# EAGLE board Senaino (EAGLE 9.5.1)
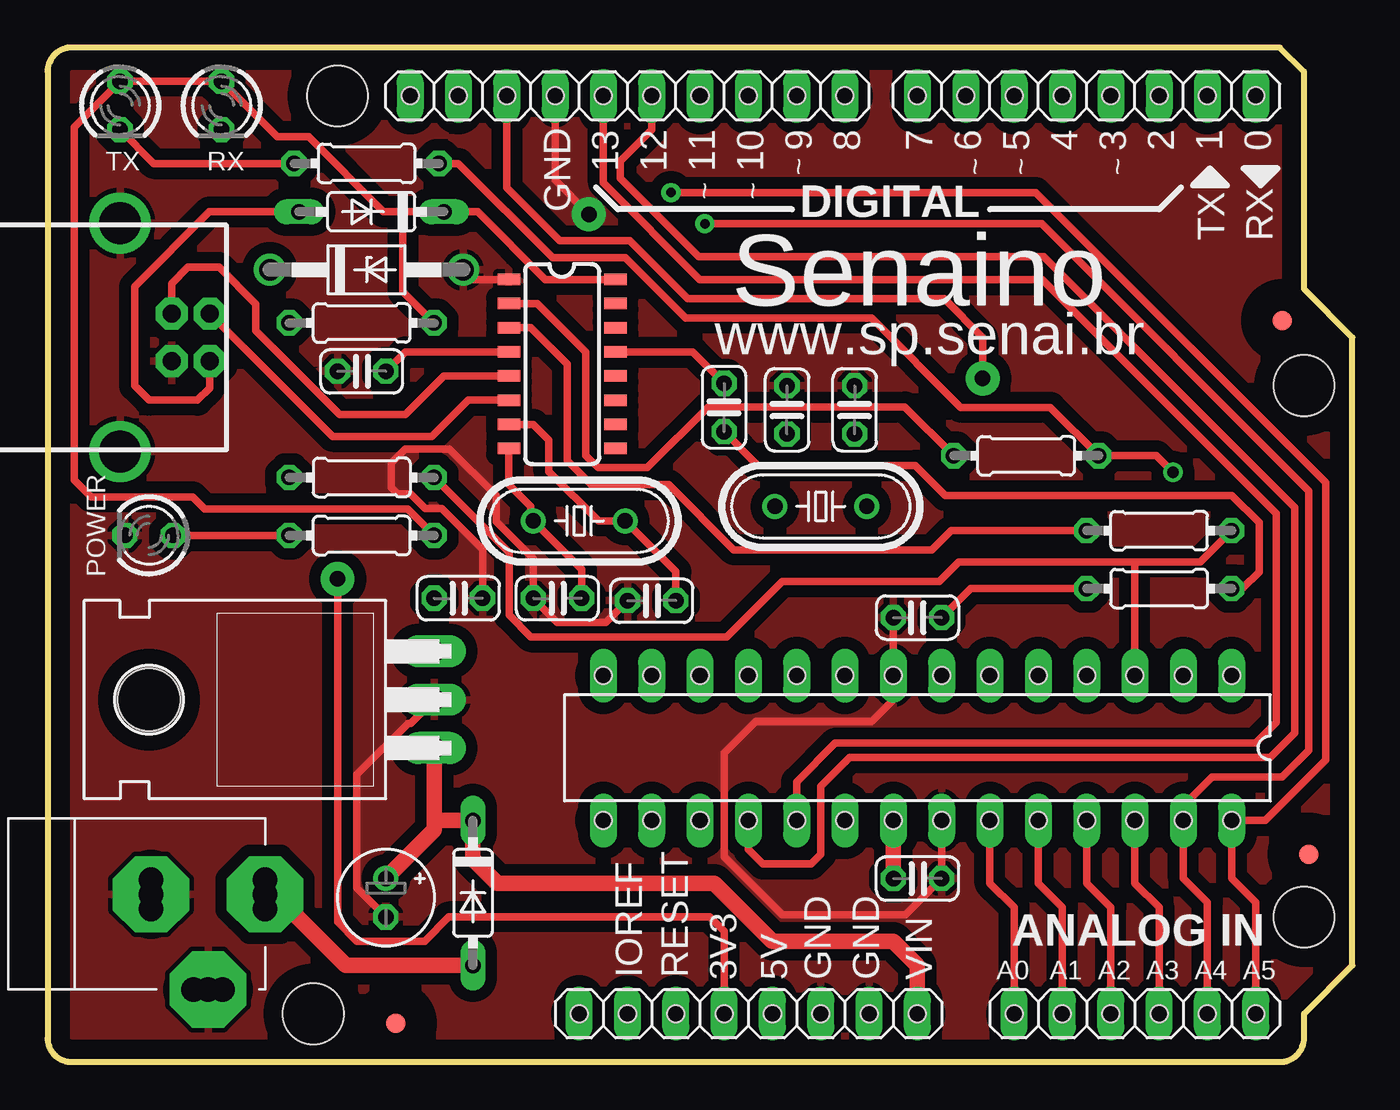
[diagram p0: board, top side]
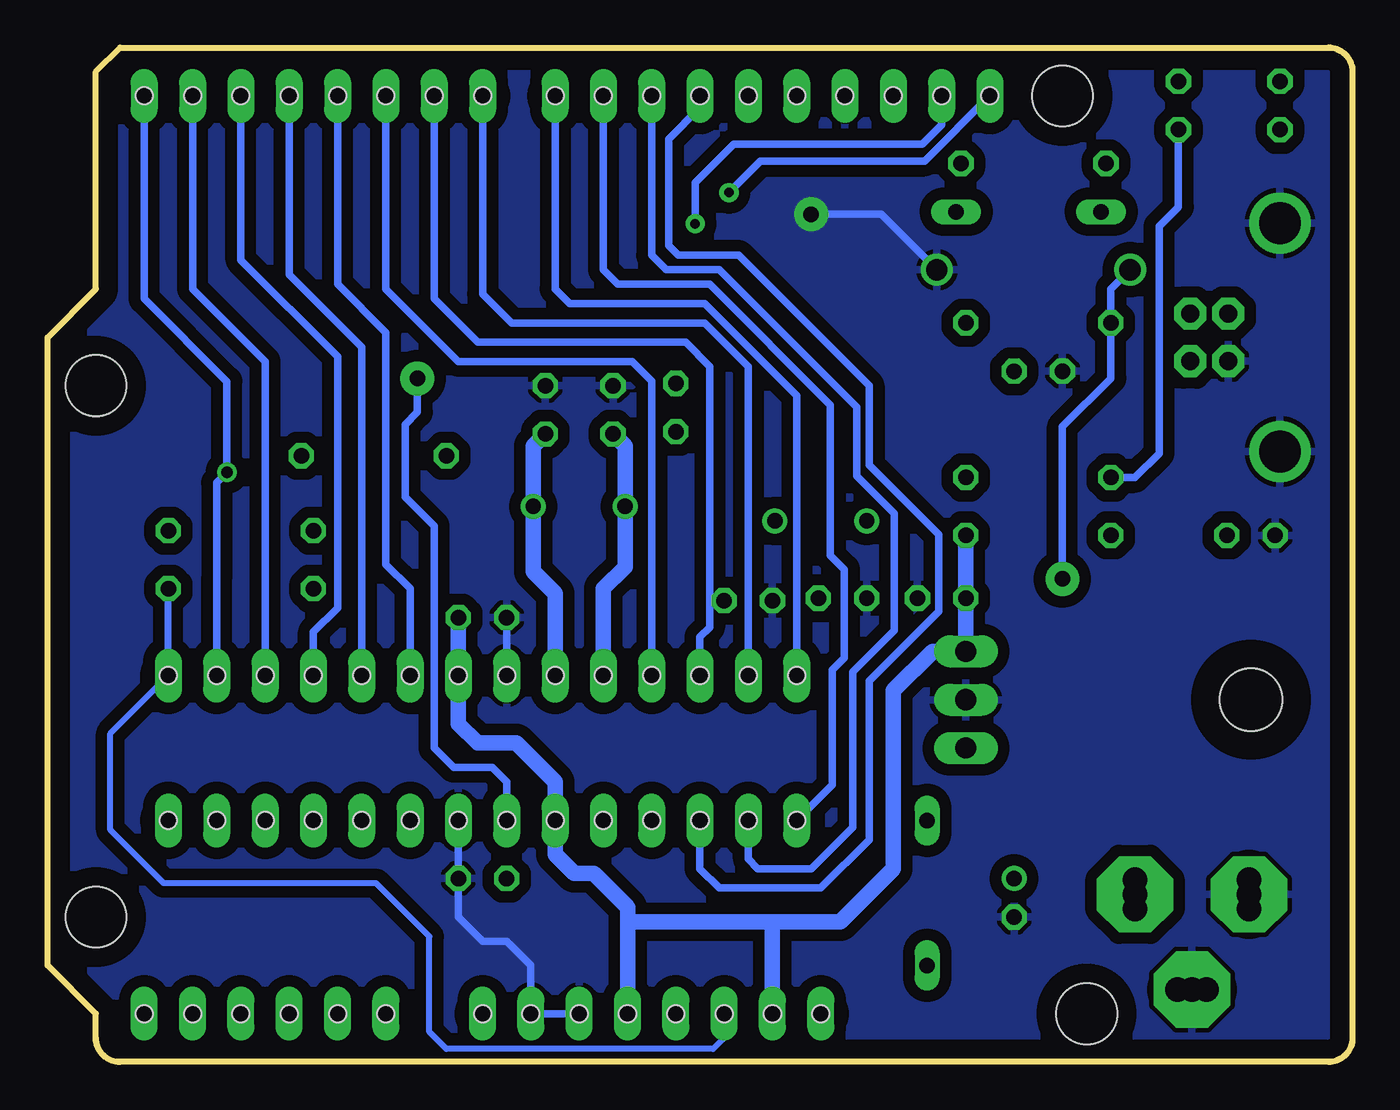
[diagram p1: board, bottom side, seen from below]

Size 68.58 x 53.34 mm. Coordinates in mm from the lower left corner, seen from the top.
Outline: 0,52.07 0,1.27 arc90 1.27,0 64.77,0 arc90 66.04,1.27 66.04,2.54 68.58,5.08 68.58,38.1 66.04,40.64 66.04,52.07 64.77,53.34 1.27,53.34 arc90 0,52.07
Copper layers (1*16): Top 0.035mm / dielectric 1.5mm / Bottom 0.035mm
Design rules "default *": minimum track width 16mil, minimum drill 24mil, track to track 8mil, track to pad 8mil, pad to pad 8mil, via to via 8mil, smd to smd 8mil, copper to edge 40mil, drill to drill 8mil, minimum pad ring 10mil, minimum via ring 8mil, stop-mask expansion 4mil, vias tented up to drill 0mil, thermal gap 10mil
Net classes: 0 default: width 0.254 mm, clearance 0.254 mm; 1 power: width 0.61 mm, drill 0.61 mm, clearance 0.254 mm; 2 gnd: width 0.305 mm, drill 0.559 mm, clearance 0.254 mm; 3 usbvcc: width 0.508 mm, drill 0.61 mm, clearance 0.254 mm; 4 aref: width 0.406 mm, drill 0.61 mm, clearance 0.254 mm
Holes 3.2 mm at 13.97,2.54 66.04,7.62 66.04,35.56 15.24,50.8
Holes 0.9 mm at 19.05,50.8 21.59,50.8 24.13,50.8 26.67,50.8 29.21,50.8 31.75,50.8 34.29,50.8 36.83,50.8 39.37,50.8 41.91,50.8 45.72,50.8 48.26,50.8 50.8,50.8 53.34,50.8 55.88,50.8 58.42,50.8 60.96,50.8 63.5,50.8 62.23,20.32 59.69,20.32 57.15,20.32 54.61,20.32 52.07,20.32 49.53,20.32 46.99,20.32 44.45,20.32 41.91,20.32 39.37,20.32 36.83,20.32 34.29,20.32 31.75,20.32 29.21,20.32 29.21,12.7 31.75,12.7 34.29,12.7 36.83,12.7 39.37,12.7 41.91,12.7 44.45,12.7 46.99,12.7 49.53,12.7 52.07,12.7 54.61,12.7 57.15,12.7 59.69,12.7 62.23,12.7 50.8,2.54 53.34,2.54 55.88,2.54 58.42,2.54 60.96,2.54 63.5,2.54 27.94,2.54 30.48,2.54 33.02,2.54 35.56,2.54 38.1,2.54 40.64,2.54 43.18,2.54 45.72,2.54

## Footprints (pad centres in the part's own frame; a part is rotated, then mirrored left to right if it is on the bottom)
1X06 = drill 0.85 pad 1.422 long: 1 -6.35,0; 2 -3.81,0; 3 -1.27,0; 4 1.27,0; 5 3.81,0; 6 6.35,0
E2-5 = drill 0.813 pad 1.27: + -1.016,0 | drill 0.813 pad 1.27 octagon: - 1.016,0
C025-024X044 = drill 0.813 octagon: 1 -1.27,0; 2 1.27,0
DO35-7 = drill 0.813 long: A 3.81,0; C -3.81,0
DIODE_DO35-7 = drill 0.813 long: A 3.81,0; C -3.81,0
DO41Z10 = drill 1.118: A 5.08,0; C -5.08,0
1X08 = drill 0.85 pad 1.422 long: 1 -8.89,0; 2 -6.35,0; 3 -3.81,0; 4 -1.27,0; 5 1.27,0; 6 3.81,0; 7 6.35,0; 8 8.89,0
1X10 = drill 0.85 pad 1.422 long: 1 -11.43,0; 2 -8.89,0; 3 -6.35,0; 4 -3.81,0; 5 -1.27,0; 6 1.27,0; 7 3.81,0; 8 6.35,0; 9 8.89,0; 10 11.43,0
FIDUCIA-MOUNT = smd 1.016 x 1.016: P$1 0,0
LED3MM = drill 0.813 octagon: A -1.27,0; K 1.27,0
HC49/S = drill 0.813: 1 -2.413,0; 2 2.413,0
0204/7 = drill 0.813 octagon: 1 -3.81,0; 2 3.81,0
DIL28-3 = drill 0.85 pad 1.422 long: 1 -16.51,-3.81; 2 -13.97,-3.81; 3 -11.43,-3.81; 4 -8.89,-3.81; 5 -6.35,-3.81; 6 -3.81,-3.81; 7 -1.27,-3.81; 8 1.27,-3.81; 9 3.81,-3.81; 10 6.35,-3.81; 11 8.89,-3.81; 12 11.43,-3.81; 13 13.97,-3.81; 14 16.51,-3.81; 15 16.51,3.81; 16 13.97,3.81; 17 11.43,3.81; 18 8.89,3.81; 19 6.35,3.81; 20 3.81,3.81; 21 1.27,3.81; 22 -1.27,3.81; 23 -3.81,3.81; 24 -6.35,3.81; 25 -8.89,3.81; 26 -11.43,3.81; 27 -13.97,3.81; 28 -16.51,3.81
TO220H = drill 1.118 long: 1 -2.54,-10.16; 2 0,-10.16; 3 2.54,-10.16 | hole 3.302: 0,4.826
SO016 = smd 0.6 x 1.2: 1 -4.445,-2.8; 2 -3.175,-2.8; 3 -1.905,-2.8; 4 -0.635,-2.8; 5 0.635,-2.8; 6 1.905,-2.8; 7 3.175,-2.8; 8 4.445,-2.8; 9 4.445,2.8; 10 3.175,2.8; 11 1.905,2.8; 12 0.635,2.8; 13 -0.635,2.8; 14 -1.905,2.8; 15 -3.175,2.8; 16 -4.445,2.8
POWERSUPPLY_DC-21MM = drill 1.3 pad 4 octagon: 1 -5.08,-3.353; 2 -0.076,-6.35; 3 -0.076,-0.356 | drill 1.3: 4 -5.08,-4.115; 5 -5.08,-2.591; 6 -0.838,-0.356; 7 0.686,-0.356; 8 -0.838,-6.35; 9 0.686,-6.35
PN61729 = drill 0.95 pad 1.676 octagon: 1 1.25,4.71; 2 -1.25,4.71; 3 -1.25,2.71; 4 1.25,2.71 | drill 2.2: P$1 -6,0; P$2 6,0

## Placement (x,y rotation side)
ANALOG  [1X06]  57.15,2.54 0 top
C1  100uF  [E2-5]  17.78,8.64 270 top
C2  100 nF  [C025-024X044]  21.59,24.38 0 top
C3  100 nF  [C025-024X044]  35.56,34.42 90 top
C4  100 nF  [C025-024X044]  16.51,36.32 0 top
C5  22 pF  [C025-024X044]  38.86,34.29 270 top
C6  22 pF  [C025-024X044]  42.42,34.29 270 top
C7  100 nF  [C025-024X044]  45.72,9.65 0 top
C8  100 nF  [C025-024X044]  45.72,23.37 180 top
C15  22 pF  [C025-024X044]  26.8,24.38 0 top
C16  22 pF  [C025-024X044]  31.75,24.26 0 top
D1  1N4007  [DO35-7]  22.35,8.89 270 top
D2  BAT43  [DIODE_DO35-7]  17.02,44.7 180 top
D3  1N4728  [DO41Z10]  16.76,41.66 0 top
DIGITAL1  [1X08]  54.61,50.8 180 top
DIGITAL2  [1X10]  30.48,50.8 180 top
FD1  FIDUCIALMOUNT  [FIDUCIA-MOUNT]  64.9,38.99 0 top
FD2  FIDUCIALMOUNT  [FIDUCIA-MOUNT]  66.29,10.92 90 top
FD3  FIDUCIALMOUNT  [FIDUCIA-MOUNT]  18.29,2.03 90 top
LED1  [LED3MM]  5.33,27.69 180 top
LED2  [LED3MM]  9.14,50.29 270 top
LED3  [LED3MM]  3.81,50.29 270 top
POWER  [1X08]  36.83,2.54 0 top
Q1  16 MHz  [HC49/S]  40.64,29.21 180 top
Q2  12 MHz  [HC49/S]  27.94,28.45 180 top
R1  330R  [0204/7]  16.51,27.69 0 top
R2  330R  [0204/7]  16.51,38.86 0 top
R3  1k  [0204/7]  16.51,30.73 180 top
R4  1k  [0204/7]  16.76,47.24 180 top
R5  10k  [0204/7]  58.42,24.89 180 top
R6  1k  [0204/7]  51.44,31.88 0 top
R7  1k  [0204/7]  58.42,27.94 0 top
U1  ATMEGA328P-PU  [DIL28-3]  45.72,16.51 180 top
U3  7805T  [TO220H]  10.16,19.05 90 top
U4  CH340G  [SO016]  27.05,36.7 270 top
X1  [POWERSUPPLY_DC-21MM]  5.08,8.89 90 top
X2  [PN61729]  3.81,38.1 270 top

## Library data of the parts
ANALOG DIGITAL1 DIGITAL2 FD1-FD3 POWER U1 X1 X2 = SmartPrj
C1-C8 C15 C16 = rcl; SPICEPREFIX: C
D1 D3 = diode
D2 = eagle-ltspice; SPICEMODEL: NONE; SPICEPREFIX: D; SPICETYPE: diode
LED1-LED3 = led
Q1 Q2 = crystal; OC_FARNELL: 1667008; OC_NEWARK: unknown
R1-R7 = rcl; SPICEPREFIX: R
U3 = linear
U4 = Serial-Basic; PROD_ID: IC-13498

## Nets
+3.3V: D3.C POWER.4 R2.1
+5V: C2.1 C8.1 D2.C LED2.A LED3.A POWER.2 POWER.5 R1.2 R2.2 R5.2 U1.7 U1.20 U3.3 U4.16
+9V: C1.+ D1.C POWER.8 U3.1
A0: ANALOG.1 U1.23
A1: ANALOG.2 U1.24
A2: ANALOG.3 U1.25
A3: ANALOG.4 U1.26
A4: ANALOG.5 DIGITAL2.9 U1.27
A5: ANALOG.6 DIGITAL2.10 U1.28
AREF: C7.1 DIGITAL2.8 U1.21
D0: DIGITAL1.1 R4.1 R6.2 U1.2
D1: DIGITAL1.2 R3.1 R7.2 U1.3
D2: DIGITAL1.3 U1.4
D3: DIGITAL1.4 U1.5
D4: DIGITAL1.5 U1.6
D5: DIGITAL1.6 U1.11
D6: DIGITAL1.7 U1.12
D7: DIGITAL1.8 U1.13
D8: DIGITAL2.1 U1.14
D9: DIGITAL2.2 U1.15
D10: DIGITAL2.3 U1.16
D11: DIGITAL2.4 U1.17
D12: DIGITAL2.5 U1.18
D13: DIGITAL2.6 U1.19
GND [gnd]: C1.- C2.2 C4.1 C5.1 C6.1 C7.2 C8.2 C15.1 C16.1 D3.A DIGITAL2.7 LED1.K POWER.6 POWER.7 U1.8 U1.22 U3.2 U4.1 X1.1 X1.3 X2.4 X2.P$1 X2.P$2
N$1: D1.A X1.2
N$2: U4.5 X2.3
N$3: C3.2 U4.13
N$4: R6.1 U4.2
N$5: U4.6 X2.2
N$8: LED2.K R3.2
N$9: LED3.K R4.2
N$10: R7.1 U4.3
N$11: C4.2 U4.4
N$12: C15.2 Q2.2 U4.8
N$13: C16.2 Q2.1 U4.7
N$29: C5.2 Q1.2 U1.10
N$30: C6.2 Q1.1 U1.9
N$31: LED1.A R1.1
RESET: C3.1 POWER.3 R5.1 U1.1
VUSB: D2.A X2.1

## Tracks (layer width: path | path; a pad name or v marks a point on that pad's centre or on a via)
+3.3V  (via drill 0.81 pad 1.78)
  Top 0.406: POWER.4 35.56,6.86 34.8,7.62 21.08,7.62 19.81,6.35 16.26,6.35 15.24,7.37 v15.24,25.4
  Bottom 0.406: D3.C 12.7,40.64 R2.1 12.7,35.94 15.24,33.4 v15.24,25.4
+5V
  Top 0.406: R5.2 48.51,24.89 C8.1 | R1.2 18.92,29.08 8.26,29.08 7.62,29.72 2.29,29.72 1.4,30.61 1.4,49.15 LED3.A LED2.A 12.06,48.64 13.72,48.64 17.65,44.7 D2.C | D2.C 18.67,44.7 18.67,40.51 R2.2 | U4.16 26.16,41.15 22.61,44.7 D2.C
  Bottom 0.813: C8.1 U1.7 46.99,17.78 45.97,16.76 43.94,16.76 41.91,14.73 U1.20 41.91,10.92 40.89,9.91 39.88,9.91 38.1,8.13 38.1,7.37 | R1.2 C2.1 U3.3 22.07,21.59 24.13,19.52 24.13,10.16 26.92,7.37 30.48,7.37 | POWER.2 30.48,7.37 | POWER.5 38.1,7.37 | 38.1,7.37 30.48,7.37
+9V
  Top 0.813: 45.72,3.81 POWER.8 45.72,5.08 44.45,6.35 38.1,6.35 35.05,9.4 23.62,9.4 22.35,10.67 D1.C 20.32,12.7 | C1.+ 20.32,12.19 20.32,12.7 | 20.32,12.7 U3.1
A0
  Top 0.406: ANALOG.1 50.8,8.13 49.53,9.4 U1.23
A1
  Top 0.406: ANALOG.2 53.34,8.13 52.07,9.4 U1.24
A2
  Top 0.406: ANALOG.3 55.88,8.13 54.61,9.4 U1.25
A3
  Top 0.406: ANALOG.4 58.42,8.13 57.15,9.4 U1.26
A4  (via drill 0.5 pad 1)
  Top 0.406: ANALOG.5 60.96,8.38 59.69,9.65 U1.27 59.69,13.46 61.21,14.99 64.9,14.99 66.29,16.38 66.29,30.02 52.24,44.07 v34.54,44.07
  Bottom 0.406: DIGITAL2.9 21.59,49.28 22.61,48.26 32.51,48.26 34.54,46.23 v34.54,44.07
A5  (via drill 0.5 pad 1)
  Top 0.406: ANALOG.6 63.5,8.38 62.23,9.65 U1.28 64.01,12.7 67.18,15.88 67.18,30.46 51.93,45.72 v32.77,45.72
  Bottom 0.406: v32.77,45.72 31.11,47.37 22.48,47.37 DIGITAL2.10 19.05,50.55
AREF  (via drill 0.81 pad 1.78)
  Top 0.406: DIGITAL2.8 24.13,45.98 26.93,43.18 30.61,43.18 33.66,40.13 47.12,40.13 49.15,38.1 v49.15,35.94
  Top 0.813: U1.21 C7.1
  Bottom 0.406: U1.21 44.45,14.73 45.21,15.49 47.24,15.49 48.26,16.51 48.26,28.19 49.78,29.72 49.78,33.53 49.15,34.16 v49.15,35.94
D0  (via drill 0.61)
  Top 0.406: R4.1 21.59,47.24 26.54,42.29 30.35,42.29 33.53,39.12 43.31,39.12 48.01,34.42 52.7,34.42 R6.2 58.27,31.88 v59.15,31
  Bottom 0.406: DIGITAL1.1 63.5,40.13 59.15,35.78 v59.15,31 59.69,30.46 59.69,25.4 59.69,25.06 U1.2
D1
  Top 0.406: 62.29,27.94 R7.2 60.58,26.29 57.15,26.29 | R3.1 24.26,26.8 24.26,23.5 25.4,22.35 35.69,22.35 38.61,25.27 46.86,25.27 47.88,26.29 57.15,26.29 | U1.3 57.15,26.29
  Bottom 0.406: U1.3 57.15,36.83 60.96,40.64 DIGITAL1.2
D2
  Bottom 0.406: U1.4 54.61,22.61 53.34,23.88 53.34,37.08 58.42,42.16 DIGITAL1.3
D3
  Bottom 0.406: U1.5 52.07,37.59 55.88,41.4 DIGITAL1.4
D4
  Bottom 0.406: U1.6 49.53,24.89 50.8,26.16 50.8,38.35 53.34,40.89 DIGITAL1.5
D5
  Bottom 0.406: 36.83,19.81 U1.11 36.83,35.81 37.85,36.83 46.99,36.83 50.8,40.64 DIGITAL1.6
D6
  Bottom 0.406: DIGITAL1.7 48.26,40.13 45.97,37.85 35.05,37.85 33.78,36.58 33.78,22.86 34.29,22.35 U1.12
D7
  Bottom 0.406: DIGITAL1.8 45.72,40.39 44.2,38.86 34.04,38.86 31.75,36.58 U1.13
D8
  Bottom 0.406: DIGITAL2.1 41.91,40.64 41.15,39.88 34.04,39.88 29.21,35.05 U1.14
D9
  Bottom 0.406: DIGITAL2.2 39.37,41.66 38.61,40.89 33.78,40.89 27.43,34.54 27.43,26.63 26.7,25.9 26.7,21.25 27.35,20.61 27.35,14.56 U1.15
D10
  Bottom 0.406: DIGITAL2.3 36.83,42.42 36.07,41.66 33.27,41.66 26.06,34.44 26.06,30.81 24.09,28.84 24.09,22.68 26.26,20.52 26.26,12.35 28.45,10.16 31.24,10.16 31.75,10.67 U1.16
D11
  Bottom 0.406: U1.17 34.29,10.16 33.27,9.14 27.94,9.14 25.4,11.68 25.4,20.02 21.74,23.68 21.74,27.73 25.4,31.38 25.4,35.56 32.26,42.42 35.43,42.42 35.94,42.93 35.94,48.51 34.29,50.16 DIGITAL2.4
D12
  Top 0.406: DIGITAL2.5 31.75,49.02 30.1,47.37 30.1,46.48 34.23,42.35 52.35,42.35 65.56,29.14 65.56,17.3 64.26,16 42.16,16 40.64,14.48 40.64,10.92 40.13,10.41 37.59,10.41 36.83,11.18 U1.18
D13
  Top 0.406: DIGITAL2.6 29.21,46.23 34.29,41.15 52.27,41.15 64.59,28.83 64.59,17.85 63.5,16.76 41.4,16.76 39.37,14.73 U1.19
GND  (via drill 0.81 pad 1.78)
  Top 0.406: U1.22 C7.2 45.09,7.75 38.61,7.75 35.56,10.79 35.56,16.26 37.21,17.91 43.31,17.91 44.45,19.05 U1.8 44.45,22.86 | U3.2 19.07,17.8 18.95,17.8 16.26,15.12 16.26,9.14 C1.- | DIGITAL2.7 26.67,46.35 v28.45,44.58 | C15.1 26.8,23.11 29.34,23.11 C16.1 | C2.2 22.86,26.95 20.7,29.1 19.84,29.1 19.09,29.86 18.41,29.86 18.07,30.2 18.07,31.5 18.8,32.23 21.12,32.23 23.57,29.77 23.57,28.41 25.53,26.46 C15.1 | C15.1 25.53,26.37 25.46,26.43 | U4.1 22.35,41.15 D3.A
  Bottom 0.406: U1.8 C8.2 | U1.22 C7.2 46.99,7.62 45.72,6.35 44.45,6.35 43.18,5.08 POWER.7 POWER.6 | D3.A 24.77,44.58 v28.45,44.58
  pour Bottom (isolate 0.61): 68.58,38.1 68.58,5.08 66.04,2.54 66.04,1.27 arc-90 64.77,0 1.27,0 arc-90 0,1.27 0,52.07 arc-90 1.27,53.34 64.77,53.34 66.04,52.07 66.04,40.64
  pour Top (isolate 0.61): 68.58,38.1 68.58,5.08 66.04,2.54 66.04,1.27 arc-90 64.77,0 1.27,0 arc-90 0,1.27 0,52.07 arc-90 1.27,53.34 64.77,53.34 66.04,52.07 66.04,40.64
N$1
  Top 0.813: X1.2 11.94,8.81 15.67,5.08 D1.A
N$2
  Top 0.406: U4.5 20.83,36.07 18.8,34.04 15.37,34.04 10.94,38.46 10.94,39.86 9.02,41.78 7.37,41.78 6.52,40.94 X2.3
N$3
  Top 0.406: U4.13 33.91,37.34 C3.2
N$4
  Top 0.406: R6.1 45.06,34.44 34.73,34.44 31.53,31.25 28.93,31.25 28.29,31.9 28.29,37.34 25.75,39.88 U4.2
N$5
  Top 0.406: X2.2 14.98,32.89 20.19,32.89 22.1,34.8 U4.6
N$8
  Bottom 0.406: R3.2 11.43,30.73 10.16,32 10.16,43.94 9.14,44.96 LED2.K
N$9
  Top 0.406: R4.2 5.59,47.24 LED3.K
N$10
  Top 0.406: R7.1 47.5,27.94 46.48,26.92 36.07,26.92 32.64,30.35 28.57,30.35 27.3,31.62 27.3,36.7 25.4,38.61 U4.3
N$11
  Top 0.406: U4.4 18.8,37.34 C4.2
N$12
  Top 0.406: U4.8 24.25,30.36 25.4,29.21 25.4,28.57 Q2.2 28.07,25.91 C15.2
N$13
  Top 0.406: 30.48,28.32 Q2.1 | C16.2 33.02,25.78 Q2.1 | U4.7 25.53,33.53 26.35,32.7 26.35,31.05 28.96,28.45 Q2.1
N$29
  Bottom 0.813: U1.10 39.37,24.89 38.23,26.04 Q1.2 38.23,32.38 C5.2
N$30
  Bottom 0.813: U1.9 41.91,24.64 43.05,25.78 Q1.1 43.05,32.38 C6.2
N$31
  Top 0.406: LED1.A R1.1
RESET
  Top 0.406: R5.1 62.8,24.89 63.67,25.76 63.67,28.36 62.25,29.78 47.18,29.78 45.59,31.37 37.34,31.37 C3.1
  Bottom 0.305: POWER.3 33.02,1.27 33.6,0.69 47.62,0.69 48.51,1.57 48.51,6.6 51.31,9.4 62.48,9.4 65.28,12.19 65.28,17.27 U1.1
  Bottom 0.356: U1.1 R5.1
VUSB
  Top 0.406: X2.1 8.52,35.44 7.87,34.8 5.33,34.8 4.57,35.56 4.57,40.77 8.51,44.7 D2.A

## Text on the board
tPlace: 13 | 12 | 11 | 10 | 9 | 8 | 7 | 6 | 5 | 4 | 3 | 2 | 1 | 0 | TX | RX | POWER
tNames: GND | ~ | ~ | ~ | ~ | ~ | ~ | DIGITAL | TX | RX | Senaino | www.sp.senai.br | ANALOG IN | IOREF | RESET | 3V3 | 5V | GND | GND | VIN | A0 | A1 | A2 | A3 | A4 | A5